# Altium PCB PIC32ETH.PcbDoc (part 2 of 2)
Units mm, origin at the board's own origin, x right, y up, seen from the top; angles counter-clockwise.
Board outline 150 x 100 mm, 4 copper layers (Layer Top, Plane 1, Plane 2, Layer Bottom), stack 1.798 mm thick; 158 components, 118 nets, 530 pads, 132 vias.
Unrouted connection lines stored in the file: 140.
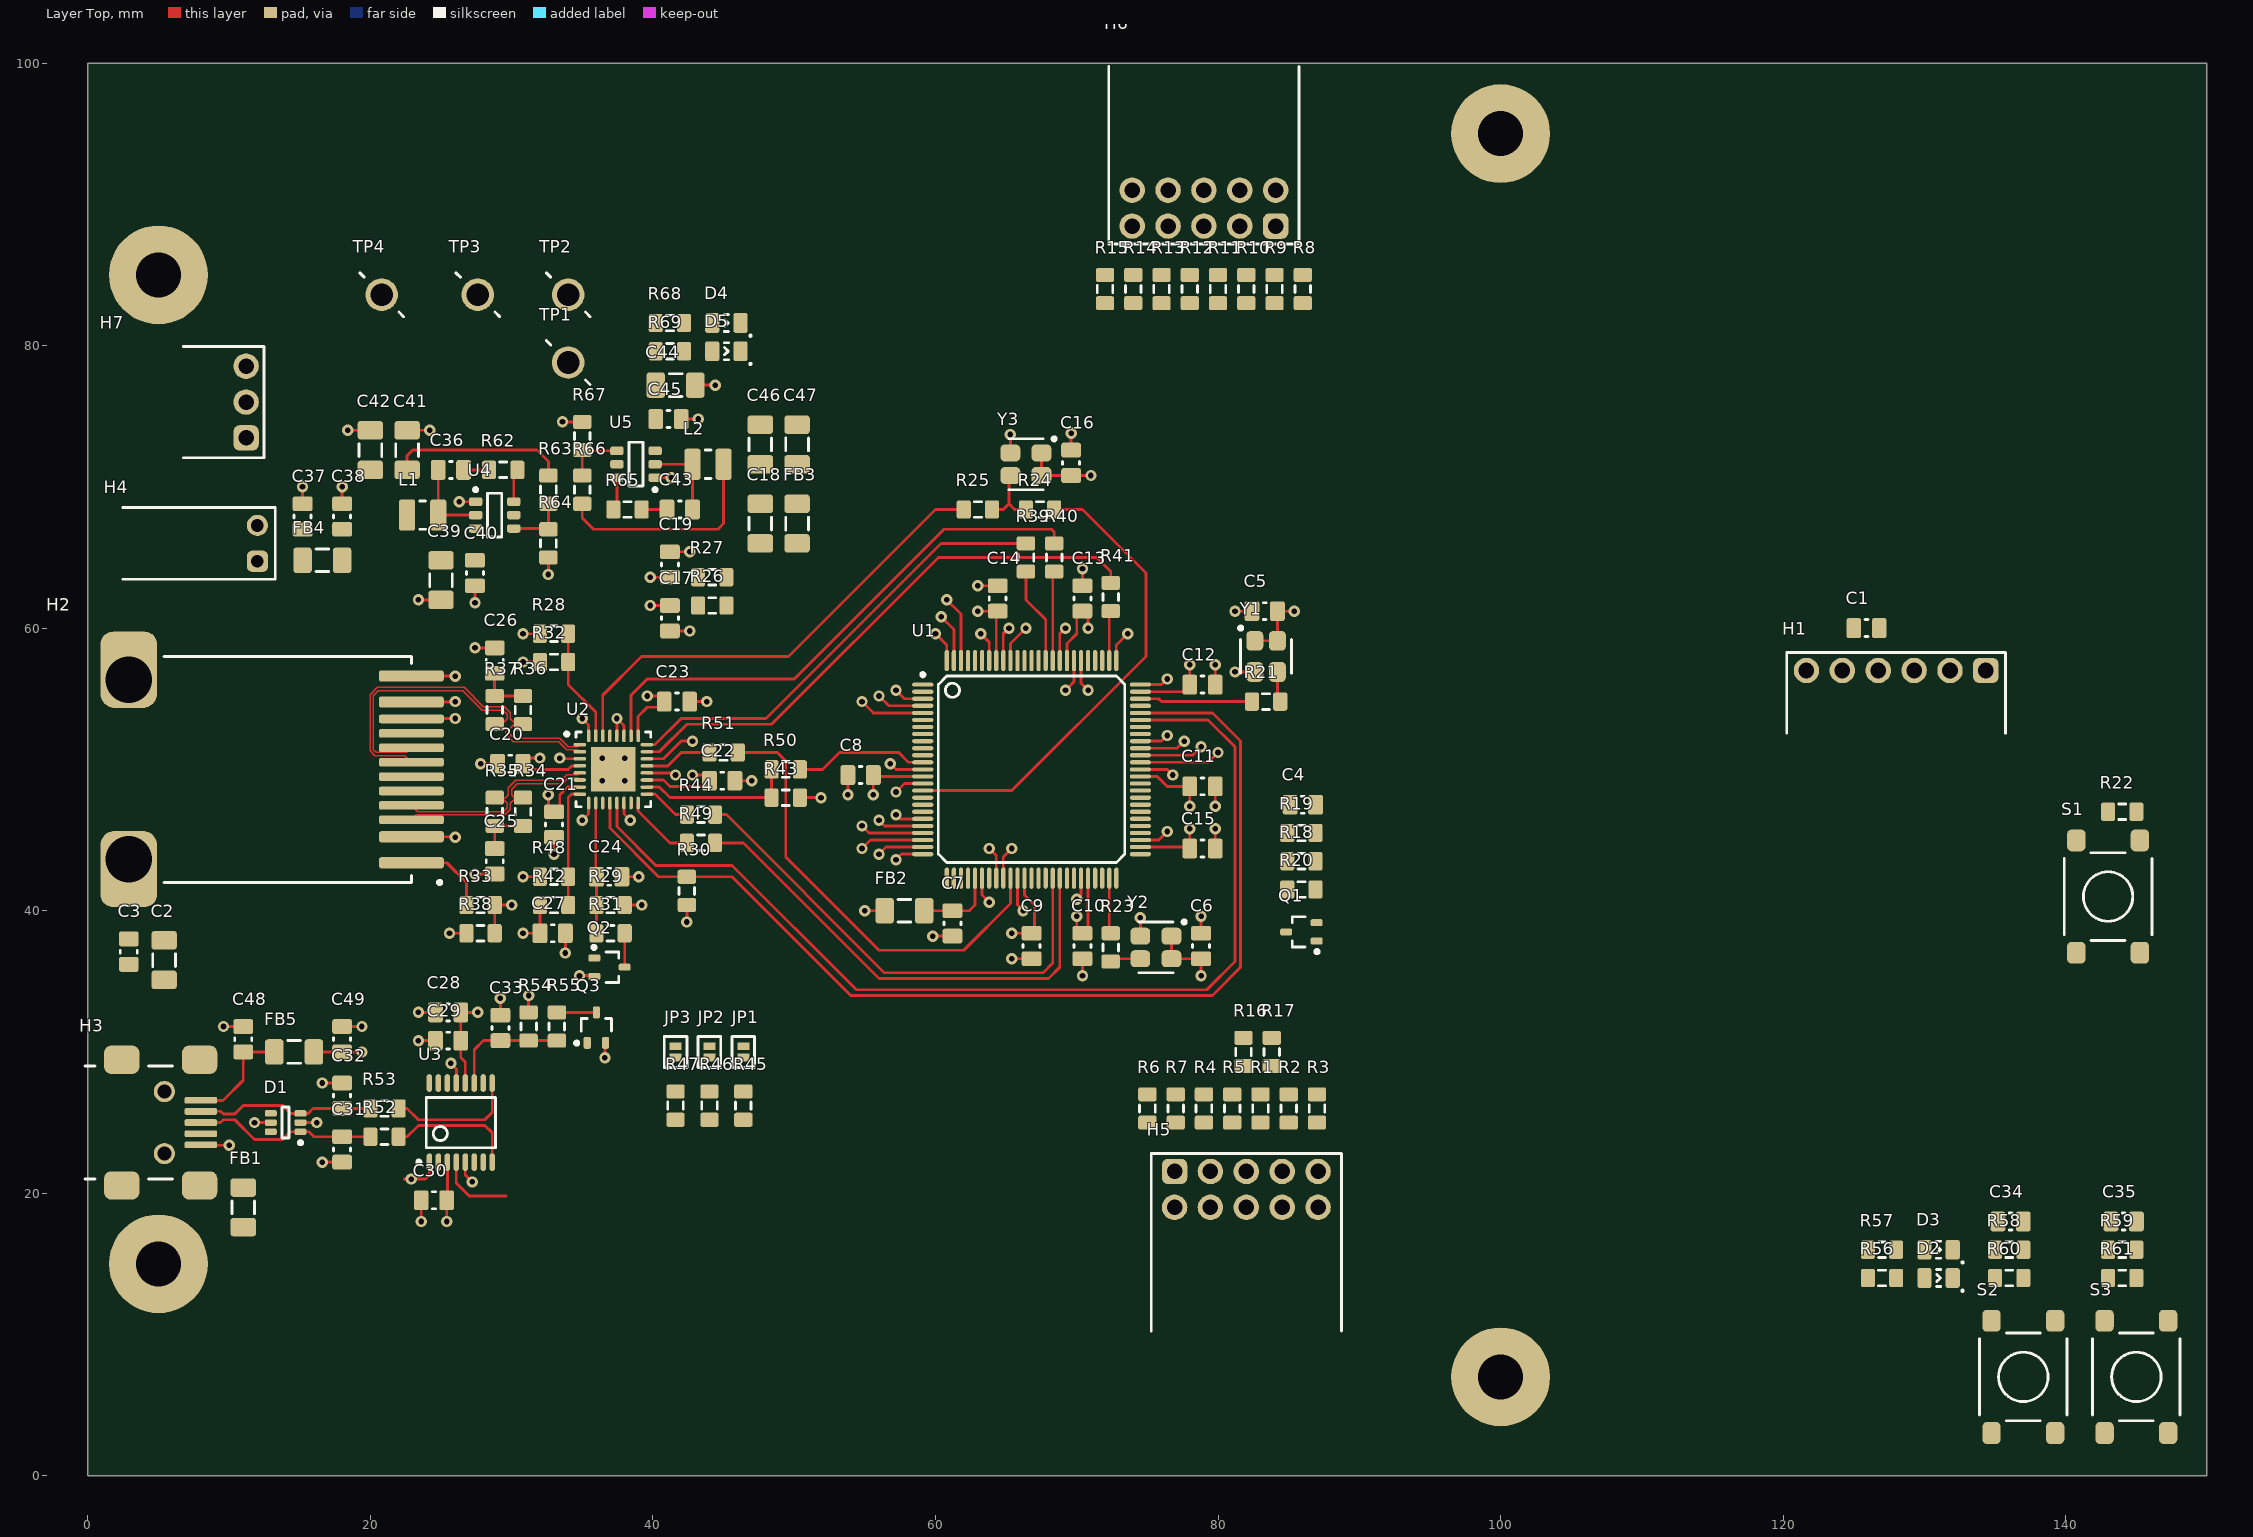
[diagram p0: Layer Top view]

## Via types
v1: diameter 0.8, hole 0.4, Layer Top to Layer Bottom, tented both sides, 132 vias

## Nets (pads, with @x,y where several pads share a name; then routed paths per layer and width w, separated by ;. In a path a pad name is that pad's centre, name@x,y a point inside that pad or via, vN(x,y) a via of type N, cw(c..) or ccw(c..) an arc to the next point about the centre after c; other vN are vias at no path point) (continued)
GND: (continued)
  Layer Top w0.2: H3.5 8.025,23.4 v1(10,23.4) ; v1(9.6,31.8) C48.1 ; D1.2 v1(16.2,25) ; C37.1 v1(15.2,70) ; v1(16.6,22.2) C31.1 ; v1(16.6,27.8) C32.1 ; C49.1 v1(19.4,31.8) ; C38.1 v1(18,70) ; v1(18.4,74) C42.1 ; C41.1 v1(24.2,74) ; H2.2 26.17,45.23 26.14,45.2 v1(26,45.2) ; v1(23.4,30.8) C29.1 ; v1(23.4,32.8) C28.2 ; v1(23.4,62) C39.1 ; v1(23.6,18) C30.2 ; v1(25.6,38.4) R38.1 ; v1(25.7,29.2) 26.1,28.8 26.1,27.817 U3.13 ; v1(26.3,68.95) U4.1 ; U3.5 26.718,21.283 v1(27.2,20.8) ; v1(27.4,42.6) C25.2 ; v1(27.4,58.6) C26.2 ; v1(27.4,61.8) C40.1 ; v1(27.8,50.4) C20.1 ; C33.1 v1(29.2,33.8) ; v1(30.8,42.4) R48.1 ; v1(32.6,63.8) R64.1 ; v1(33,44) C21.1 ; v1(33.4,50.8) 33.45,50.75 U2.3 ; v1(33.6,74.6) R67.1 ; v1(33.8,37) C27.2 ; v1(34.8,35.4) 35.8,35.4 Q2.2 ; v1(35,46.4) 35.45,46.85 U2.9 ; v1(36.6,29.6) 36.6,30.6 Q3.2 ; U2.28 v1(37.45,53.6) 37.95,53.1 U2.27 ; C24.1 v1(39,42.4) ; U5.1 v1(41.3,70.65) ; C17.2 v1(42.6,59.8) ; C19.2 v1(42.6,65.4) ; C45.1 v1(43.2,74.8) ; C23.1 v1(43.8,54.8) ; C44.1 v1(44.4,77.2) ; C22.1 v1(47,49.2) ; v1(53.8,48.2) C8.2 ; v1(56.8,50.4) 57.2,50 U1.13 ; v1(59.8,38.2) C7.2 ; v1(63,63) C14.2 ; U1.31 63.3,41.1 v1(63.8,40.6) ; U1.92 64.8,59.6 v1(65.2,60) ; Y3.2 v1(65.3,73.7) ; v1(65.4,36.6) C9.2 ; U1.36 65.8,40.4 v1(66.2,40) ; U1.84 68.8,59.6 v1(69.2,60) ; C16.1 v1(69.6,73.8) ; v1(70,40.8) 70.3,41.1 U1.45 ; v1(70.4,35.4) C10.2 ; C13.2 v1(70.4,64.2) ; Y2.2 v1(74.5,39.5) ; U1.53 75.8,45 v1(76.4,45.6) ; U1.63 76.4,50 v1(76.8,49.6) ; U1.75 76,56 v1(76.4,56.4) ; C6.1 v1(78.8,39.6) ; C15.2 v1(79.8,45.8) ; v1(79.8,47.4) C11.2 ; C12.2 v1(79.8,57.4) ; v1(81.2,56.9) Y1.2 ; v1(81.2,61.2) C5.1
  other v1: 36.4,49.2 38,49.2 36.4,50.8 38,50.8
GPIO_RE0: H6.3 R8.1
GPIO_RE0_0: R8.2 U1.91 | length 2.8
  Layer Top w0.2: U1.91 65.3,58.9 65.6,59.2 v1(66.4,60)
GPIO_RE1: H6.4 R9.1
GPIO_RE1_0: R9.2 U1.94 | length 2.1
  Layer Top w0.2: v1(63.2,59.6) 63.8,59 U1.94
GPIO_RE2: H6.5 R10.1
GPIO_RE2_0: R10.2 U1.98 | length 4.7
  Layer Top w0.2: v1(60.8,62) 61.8,61 U1.98
GPIO_RE3: H6.6 R11.1
GPIO_RE3_0: R11.2 U1.99 | length 3.5
  Layer Top w0.2: v1(60.4,60.8) 61.3,59.9 U1.99
GPIO_RE4: H6.7 R12.1
GPIO_RE4_0: R12.2 U1.100 | length 2.2
  Layer Top w0.2: v1(60,59.6) 60.8,58.8 U1.100
GPIO_RE5: H6.8 R13.1
GPIO_RE5_0: R13.2 U1.3 | length 2.1
  Layer Top w0.2: v1(57.2,55.6) 57.8,55 U1.3
GPIO_RE6: H6.9 R14.1
GPIO_RE6_0: R14.2 U1.4 | length 3.4
  Layer Top w0.2: v1(56,55.2) 56.7,54.5 U1.4
GPIO_RE7: H6.10 R15.1
GPIO_RE7_0: R15.2 U1.5 | length 4.6
  Layer Top w0.2: v1(54.8,54.8) 55.6,54 U1.5
I2C1_SCL_0: R4.2 R16.1 U1.66 | length 3.3
  Layer Top w0.2: U1.66 77.1,51.5 v1(77.6,52)
I2C1_SCL_1: H5.5 R4.1
I2C1_SDA_0: R5.2 R17.1 U1.67 | length 2.1
  Layer Top w0.2: U1.67 76,52 v1(76.4,52.4)
I2C1_SDA_1: H5.6 R5.1
ICSP_MCLR: H1.6 R19.1 U1.15 | length 2.1
  Layer Top w0.2: v1(57.2,48.4) 57.8,49 U1.15
ICSP_PGE1_CLK: H1.3 U1.24 | length 3.3
  Layer Top w0.2: v1(56,44) 56.5,44.5 U1.24
ICSP_PGE1_DATA: H1.2 U1.25 | length 2.1
  Layer Top w0.2: v1(57.2,43.6) 57.6,44 U1.25
NetC2_2: C2.2 C3.2 H2.10 H2.13 | length 3.1
  Layer Top w0.2: H2.10@22.93,53.6 v1(26,53.6)
NetC4_1: C4.1 R18.1 R19.2 R20.1
NetC7_1: C7.1 FB2.2 U1.30 | length 5.7
  Layer Top w0.2: FB2.2 C7.1 62.4,40 62.8,40.4 U1.30
NetC25_1: C25.1 R34.1 R35.1 | length 3.6
  Layer Top w0.2: C25.1 R35.1 R34.1
NetC26_1: C26.1 R36.1 R37.1 | length 3.6
  Layer Top w0.2: C26.1 28.775,56.775 28.775,55.225 R37.1 R36.1
NetC36_2: C36.2 R62.2 | length 1.8
  Layer Top w0.2: C36.2 R62.2
NetC43_2: C43.2 R65.2 | length 1.8
  Layer Top w0.2: R65.2 C43.2
NetD2_2: D2.2 R56.2
NetD3_2: D3.2 R57.2
NetD4_2: D4.2 R68.1
NetD5_2: D5.2 R69.1
NetFB1_1: FB1.1 H3.6
NetJP1_1: JP1.1 R45.2
NetJP1_2: JP1.2 U2.14 | length 1.4
  Layer Top w0.2: U2.14 37.95,46.85 v1(38.4,46.4)
NetJP2_1: JP2.1 R46.2
NetJP2_2: JP2.2 U2.22 | length 3.7
  Layer Top w0.2: U2.22 40.75,50.75 42,52 v1(42.8,52)
NetJP3_1: JP3.1 R47.2
NetJP3_2: JP3.2 U2.20 | length 2.1
  Layer Top w0.2: U2.20 41.45,49.75 v1(41.6,49.6)
NetQ1_3: Q1.3 R20.2
NetQ2_3: Q2.3 R31.1 | length 2.4
  Layer Top w0.2: Q2.3 R31.1
NetQ3_3: Q3.3 R55.1 | length 2.8
  Layer Top w0.2: R55.1 Q3.3
NetR28_2: R28.2 R32.2 U2.31 | length 8
  Layer Top w0.2: R28.2 R32.2 34,56 35.95,54.05 U2.31
NetR33_2: R33.2 R38.2 U2.32 | length 4.6
  Layer Top w0.2: R38.2 R33.2 v1(30,40.4) ; v1(35,53.6) 35.45,53.15 U2.32
NetR58_2: R58.2 R60.2 S2.2
NetR59_2: R59.2 R61.2 S3.2
PER_BTN0: C34.1 R58.1 U1.21 | length 3.3
  Layer Top w0.2: v1(56,46.4) 56.4,46 U1.21
PER_BTN1: C35.1 R59.1 U1.20 | length 2
  Layer Top w0.2: v1(57.2,46.8) 57.5,46.5 U1.20
PER_LED0: R56.1 U1.23 | length 4.5
  Layer Top w0.2: v1(54.8,44.4) 55.4,45 U1.23
PER_LED1: R57.1 U1.22 | length 4.5
  Layer Top w0.2: v1(54.8,46) 55.3,45.5 U1.22
RESET: Q1.1 Q2.1 Q3.1 R22.2 S1.1
SPI1_MISO_0: R3.2 U1.33 | length 2.3
  Layer Top w0.2: v1(63.8,44.4) 64.3,43.9 U1.33
SPI1_MISO_1: H5.9 R3.1
SPI1_MOSI_0: R2.2 U1.34 | length 2.3
  Layer Top w0.2: U1.34 64.8,43.8 v1(65.4,44.4)
SPI1_MOSI_1: H5.8 R2.1
SPI1_SCK_0: R1.2 U1.76 | length 2.2
  Layer Top w0.2: U1.76 72.8,58.8 v1(73.6,59.6)
SPI1_SCK_1: H5.7 R1.1
UART1_RX_PIC: U1.64 U3.1 | length 8.6
  Layer Top w0.2: 22.4,21 23.9,21 24.178,21.278 U3.1 ; U1.64 79.3,50.5 v1(80,51.2)
  other v1: 22.9,21
UART1_TX_PIC: U1.65 U3.4 | length 9.9
  Layer Top w0.2: U3.4 26.083,20.718 27,19.8 29.6,19.8 ; U1.65 78.2,51 v1(78.8,51.6)
UART2_RX_PIC_0: R7.2 U1.81 | length 2.3
  Layer Top w0.2: U1.81 70.3,56.1 v1(70.8,55.6)
UART2_RX_PIC_1: H5.4 R7.1
UART2_TX_PIC_0: R6.2 U1.82 | length 2.3
  Layer Top w0.2: v1(69.2,55.6) 69.8,56.2 U1.82
UART2_TX_PIC_1: H5.3 R6.1
USB_+5V: C49.2 FB5.2 H7.3 | length 3.4
  Layer Top w0.2: FB5.2 C49.2 v1(19.4,30)
USB_+5V_IN: C48.2 FB5.1 H3.1 | length 7.8
  Layer Top w0.2: H3.1 9.575,26.575 11,28 C48.2 FB5.1
USB_DATA_0_N: C32.2 D1.3 H3.2 R53.1 | length 12.7
  Layer Top w0.2: H3.2 8.013,25.8 9.4,25.8 9.6,25.6 10.4,25.6 11,26.2 13.8,26.2 14.35,25.65 D1.3 15.6,25.65 15.95,26 C32.2 R53.1
USB_DATA_0_P: C31.2 D1.1 H3.3 R52.1 | length 13
  Layer Top w0.2: H3.3 9.4,25 9.6,25.2 10.4,25.2 11.8,23.8 13.8,23.8 14.35,24.35 D1.1 15.65,24.35 16,24 C31.2 R52.1
USB_DATA_1_N: R53.2 U3.9 | length 9.2
  Layer Top w0.2: R53.2 22.6,26 23.4,25.2 28.1,25.2 28.623,25.723 U3.9
USB_DATA_1_P: R52.2 U3.8 | length 9.2
  Layer Top w0.2: R52.2 22.6,24 23.4,24.8 28.1,24.8 28.623,24.278 U3.8
USB_RESET: C33.2 R54.1 R55.2 U3.11 | length 8.5
  Layer Top w0.2: U3.11 27.353,30.153 28,30.8 C33.2 R54.1 R55.2
pads on no net: D1.4 D1.6 H1.1 H2.5 H2.6 H2.9 H3.4 H3.7 H3.8 S1.2 S1.4 S2.1 S2.3 S3.1 S3.3 U1.1 U1.2 U1.6 U1.7 U1.8 U1.9 U1.10 U1.11 U1.17 U1.18 U1.19 U1.26 U1.27 U1.28 U1.29 U1.32 U1.38 U1.39 U1.40 U1.43 U1.44 U1.47 U1.48 U1.50 U1.51 U1.54 U1.55 U1.56 U1.57 U1.58 U1.59 U1.60 U1.61 U1.68 U1.69 U1.72 U1.78 U1.79 U1.80 U1.87 U1.88 U1.89 U1.90 U1.95 U1.96 U1.97 U2.11 U2.15 U2.29 U3.2 U3.6 U3.7 U3.10 U3.14 U3.15 U3.16 U4.5 U5.5

## Polygon pours and split planes (outlines as drawn)
GND on Plane 1 (split plane): 149.49,99.49 149.49,0.51 0.51,0.51 0.51,99.49
+3V3 on Plane 2 (split plane): 149.49,99.49 149.49,0.51 0.51,0.51 0.51,99.49